# Altium PCB pqxPCB - 副本 (2).PcbDoc
Units mil, origin at the board's own origin, x right, y up, seen from the top; angles counter-clockwise.
Board outline 5905.51 x 3937.01 mil, 2 copper layers (Top Layer, Bottom Layer); 21 components, 37 nets, 167 pads, 0 vias.
Unrouted connection lines stored in the file: 4.
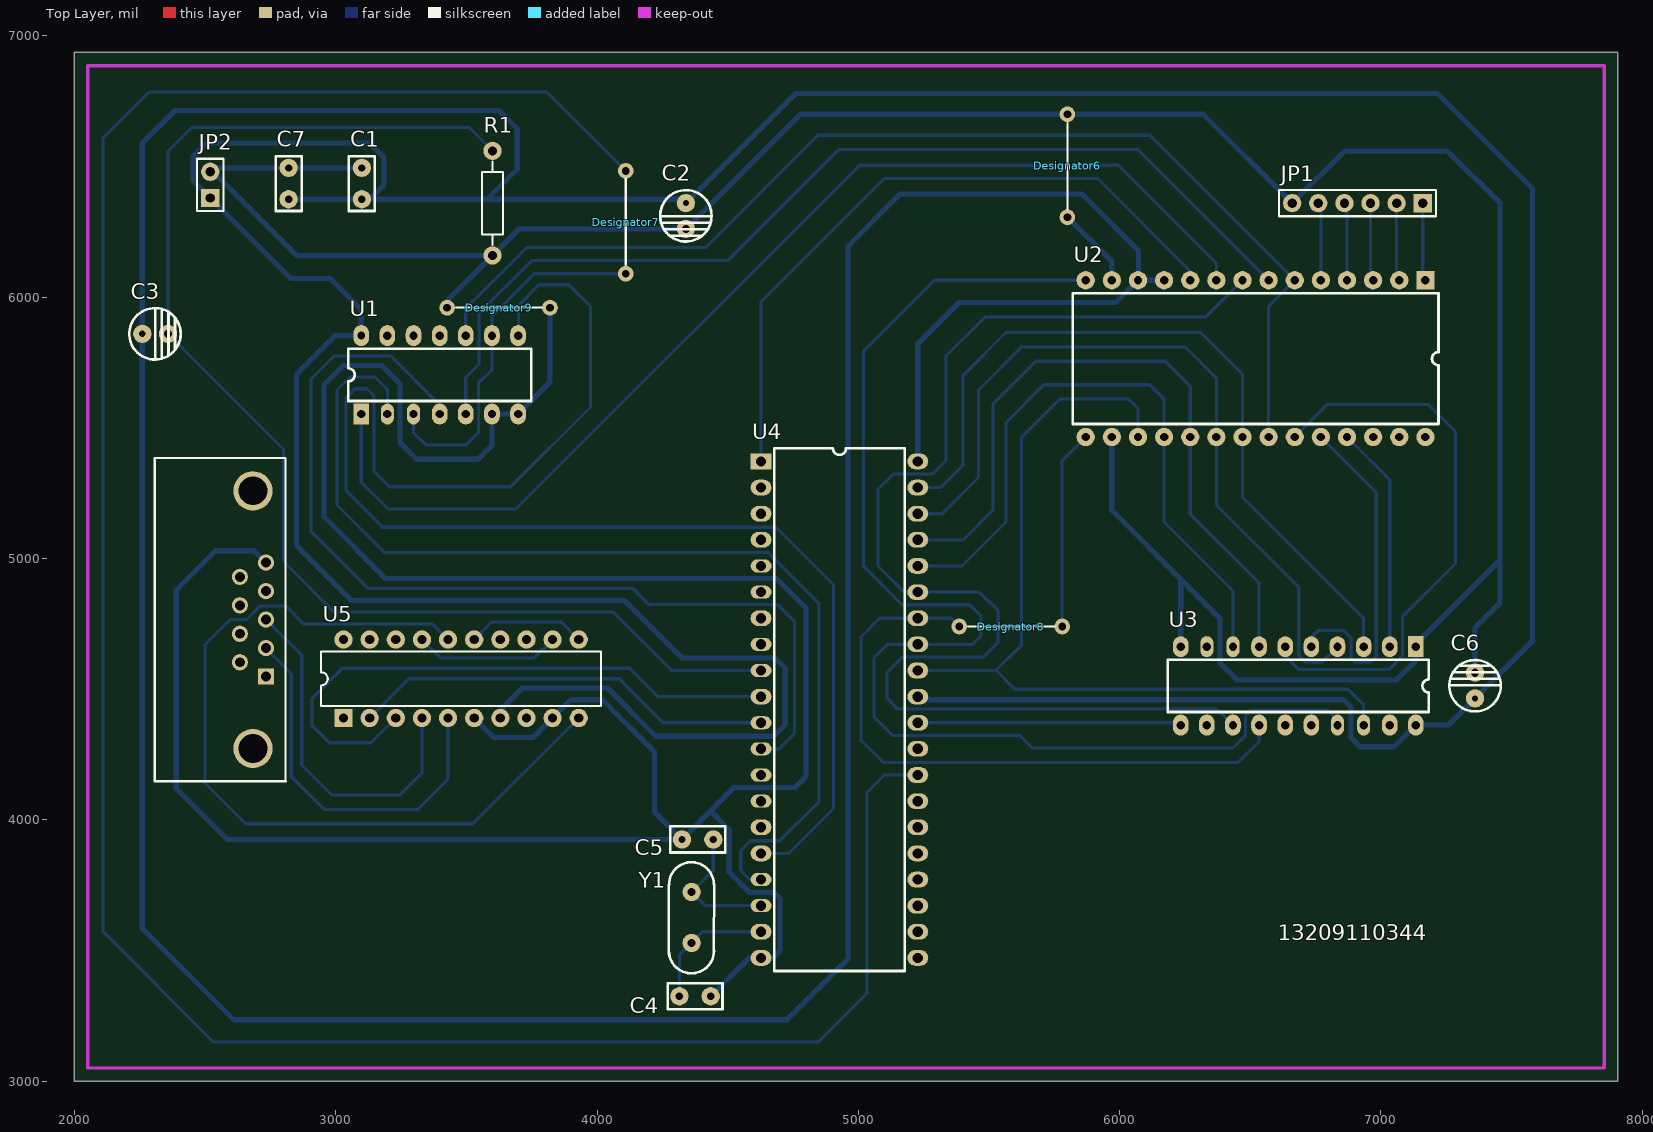
[diagram p0: Top Layer view]
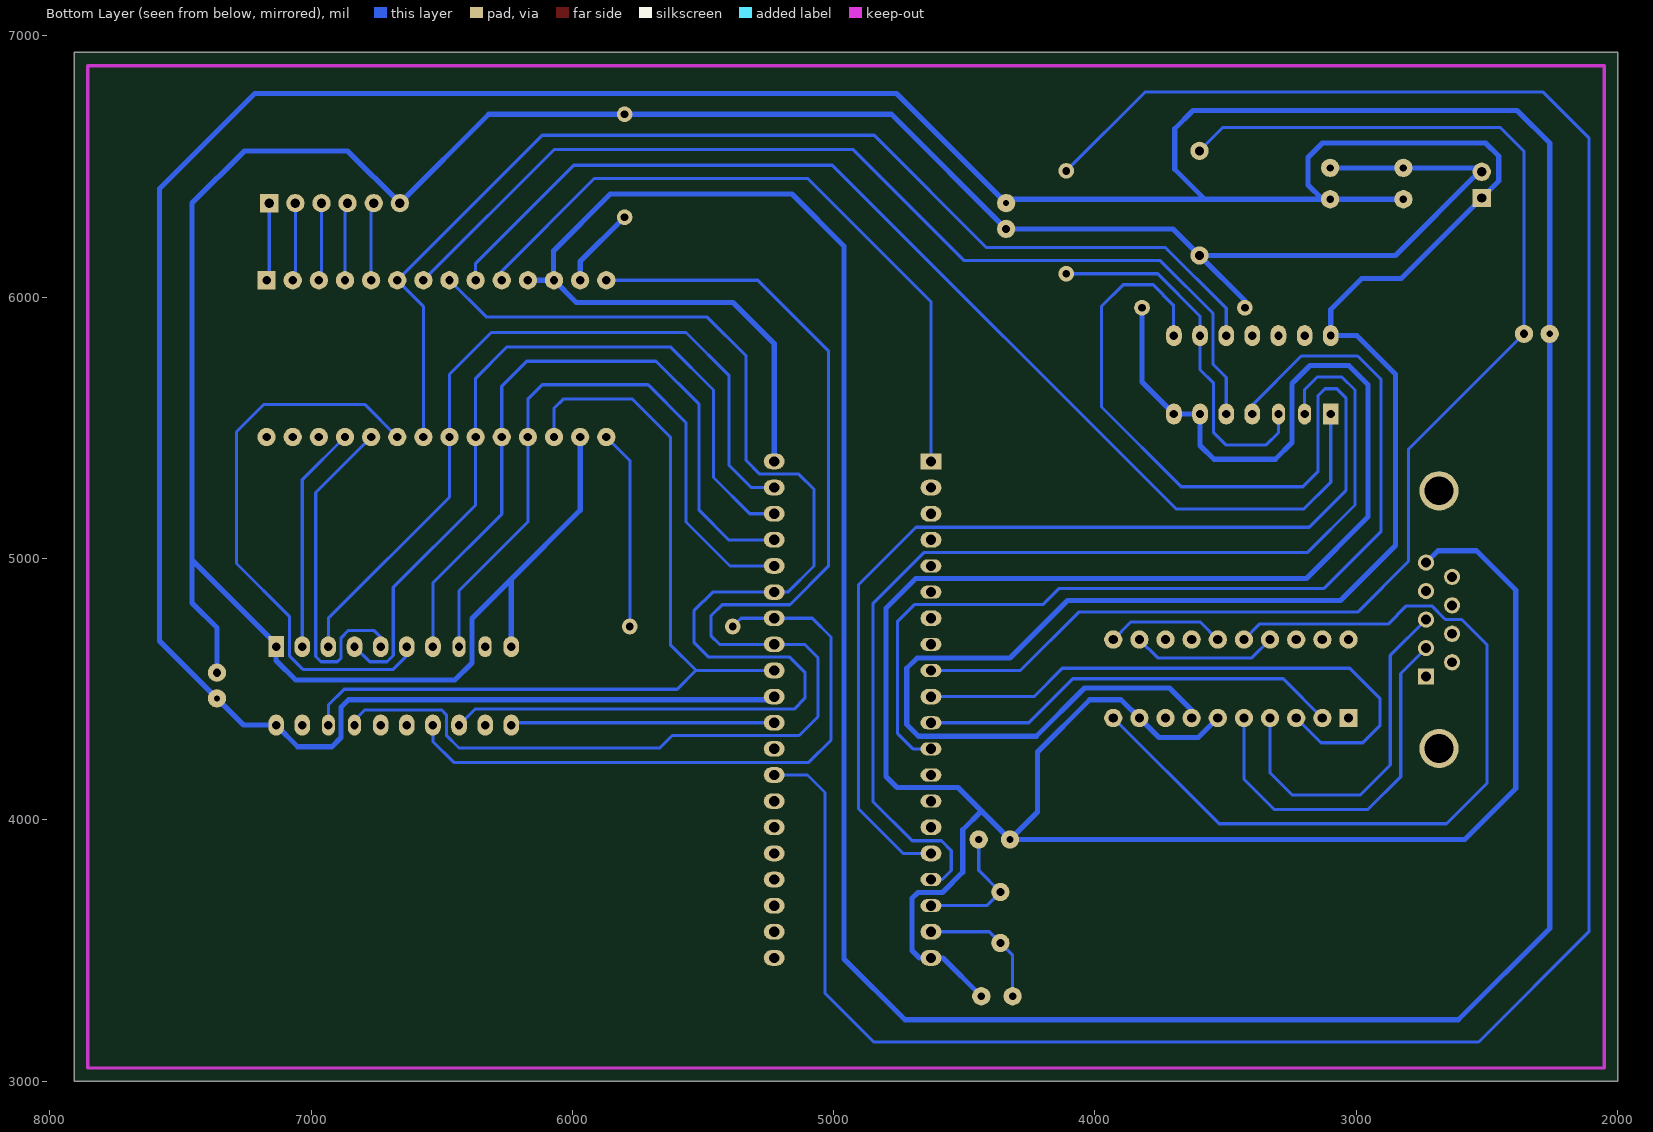
[diagram p1: Bottom Layer view, seen from below]

## Layer stack, top to bottom
Top Layer: signal copper 1.4
Dielectric: dielectric 12.6, FR-4, Dk 4.8
Bottom Layer: signal copper 1.4

## Board outline
2000,3000 7905.51,3000 7905.51,6937.01 2000,6937.01

## Design rules (kind name [scope] priority, off if disabled: settings)
Clearance [All] p1: gap=11.81
HoleSize [All] p1: absolutevalues=TRUE maxlimit=120 minlimit=1 maxpercent=80.000 minpercent=20.000
PolygonConnect [All] p1: connectstyle=Relief reliefconductorwidth=10 reliefentries=4 polygonreliefangle="90 Angle"
RoomDefinition pqxSheet01 [InComponentClass('pqxSheet01')] p1: confinementstyle=ConfineIn formatcopy=TRUE lockcomponents=FALSE outline 2051.18,6885.83 7854.33,6885.83 7854.33,3051.18 2051.18,3051.18
RoutingLayers [All] p1: top layer_v5=FALSE bottom layer_v5=TRUE
RoutingVias [All] p1: holewidth=23.62 width=70 viastyle="Through Hole" minholewidth=28 minwidth=60 maxholewidth=28 maxwidth=90
SilkscreenOverComponentPads [All] p1: minsilkscreentomaskgap=0
SolderMaskExpansion [All] p1: expansion=4
TestPointUsage [All] p1: valid=0 allowmultiple=FALSE
Testpoint [All] p1: side=15 testpointundercomponent=TRUE minsize=40 maxsize=100 preferedsize=60 minholesize=0 maxholesize=40 preferedholesize=32 testpointgrid=1 style=1023 order=0-112345678
Width Width_VCC_GND [(InNet('VCC') AND InNet('GND'))] p1: maxlimit=40 minlimit=20 preferedwidth=20
Width [All] p2: maxlimit=40 minlimit=12 preferedwidth=12
21 further rules are at their usual default settings.

## Classes and differential pairs
component class pqxSheet01: C1 C2 C3 C4 C5 C6 C7 JP1 JP2 R1 U1 U2 U3 U4 U5 Y1

## Components (designator, comment, footprint, x,y, rotation, side; value= is the part's Value field where it differs from the comment)
C1 "Cap" CB1 3100,6440 r270 top
C2 "Cap Pol1" CD2.5-5.0 4340,6360 r90 top
C3 "Cap Pol1" CD2.5-5.0 2260,5860 r180 top
C4 "Cap" CB1 4380,3325 r180 top
C5 "Cap" CB1 4380,3925 r0 top
C6 "Cap Pol1" CD2.5-5.0 7360,4465 r270 top
C7 "Cap" CB1 2820,6440 r270 top
Designator6 "Comment" JUMP10 5800,6306.3 r90 top
Designator7 "Comment" JUMP10 4110,6483.7 r270 top
Designator8 "Comment" JUMP10 5780,4740 r180 top
Designator9 "Comment" JUMP10 3820,5960 r180 top
JP1 "MHDR1X6" HDR1X6 7160,6360 r180 top
JP2 "MHDR1X2" HDR1X2 2520,6380 r90 top
R1 "Res2" AXIAL-0.4 3600,6360 r90 top
U1 "74LS02" DIP14 3400,5700 r90 top
U2 "ADC0809CCN" DIP28-WIDE 7170,6065 r270 top
U3 "74LS374" DIP20 6720,4505 r270 top
U4 "DS5000T-32-16" UDIP40 4860,4765 r0 top
U5 "MAX233AEPP" PP20 3480,4540 r0 top
Y1 "XTAL" JZ 4360,3625 r270 top
? "DB9" DB9U 2600,4760 r90 top

## Footprints (in the part's own frame and the unit in brackets; to place one, negate y for a bottom-side part, rotate by r counter-clockwise, add the part's x,y. Pads: shape width x height; smd on the part's side, far side on the other; paste and mask are expansions set on the pad)
AXIAL-0.4 [mil] "Resistor; 2 Leads"
  round 70 hole 33.46: 1(-200,0) 2(200,0)
  silkscreen extent -160,-40 160,40
CB1 [mil] "3mm,5.3mm"
  round 70 hole 27.56: 1(-55,0) 2(65,0)
  silkscreen extent -100,-50 110,50
CD2.5-5.0 [mil]
  round 70 hole 23.62: 1(0,0)
  round 70 hole 31.5: 2(-98.43,0)
  silkscreen extent -147,-98 50,98
DB9U [mil]
  rect 62x62 hole 38: 1(-211.81,-133.23)
  round 62 hole 38: 2(-102.81,-133.23) 3(6.19,-133.23) 4(115.19,-133.23) 5(224.19,-133.23) 6(-156.81,-33.23) 7(-47.81,-33.23) 8(61.19,-33.23) 9(170.19,-33.23)
  round 150 hole 110: ""(-486.81,-83.23) ""(499.19,-83.23)
  silkscreen extent -612,-208 624,292
DIP14 [mil]
  rect 80x60 hole 32: 1(-146.93,302.13)
  oval 80x50 hole 32: 2(-146.93,202.13) 3(-146.93,102.13)
  oval 80x60 hole 32: 4(-146.93,2.13) 5(-146.93,-97.87) 6(-146.93,-197.87) 7(-146.93,-297.87) 8(153.07,-297.87) 9(153.07,-197.87) 10(153.07,-97.87) 11(153.07,2.13) 12(153.07,102.13) 13(153.07,202.13)
  oval 80x60 hole 30: 14(153.07,302.13)
  silkscreen extent -97,-348 103,352
DIP20 [mil]
  rect 80x60 hole 32: 1(-157.72,413.47)
  oval 80x60 hole 32: 2(-157.72,313.47) 3(-157.72,213.47) 4(-157.72,113.47) 5(-157.72,13.47) 6(-157.72,-86.53) 7(-157.72,-186.53) 10(-157.72,-486.53) 11(142.28,-486.53) 12(142.28,-386.53) 13(142.28,-286.53) 14(142.28,-186.53) 15(142.28,-86.53) 16(142.28,13.47) 19(142.28,313.47) 20(142.28,413.47)
  oval 80x50 hole 32: 8(-157.72,-286.53) 9(-157.72,-386.53) 17(142.28,113.47) 18(142.28,213.47)
  silkscreen extent -108,-537 92,463
DIP28-WIDE [mil]
  rect 70x70 hole 32: 1(0,0)
  round 70 hole 32: 2(0,-100) 3(0,-200) 4(0,-300) 5(0,-400) 6(0,-500) 7(0,-600) 8(0,-700) 9(0,-800) 10(0,-900) 11(0,-1000) 12(0,-1100) 13(0,-1200) 14(0,-1300) 15(600,-1300) 16(600,-1200) 17(600,-1100) 18(600,-1000) 19(600,-900) 20(600,-800) 21(600,-700) 22(600,-600) 23(600,-500) 24(600,-400) 25(600,-300) 26(600,-200) 27(600,-100) 28(600,0)
  silkscreen extent 50,-1350 550,50
HDR1X2 [mil] "Connector; Header; 2 Position"
  rect 70x70 hole 35.43: 1(0,0)
  round 70 hole 35.43: 2(100,0)
  silkscreen extent -50,-50 150,50
HDR1X6 [mil] "Connector; Header; 6 Position"
  rect 70x70 hole 35.43: 1(0,0)
  round 70 hole 35.43: 2(100,0) 3(200,0) 4(300,0) 5(400,0) 6(500,0)
  silkscreen extent -50,-50 550,50
JUMP10 [mil] "10mm跳线"
  round 60 hole 30: 0(0,0) 0(393.7,0)
  silkscreen extent 30,0 360,0
JZ [mil]
  round 70 hole 30: 1(-99.09,2.17) 2(95.91,2.17)
  silkscreen extent -213,-86 212,88
PP20 [mil] "DIP; 20 Leads; Row Spacing 7.62 mm; Pitch 2.54 mm"
  rect 70x70 hole 35.43: 1(-450,-150)
  round 70 hole 35.43: 2(-350,-150) 3(-250,-150) 4(-150,-150) 5(-50,-150) 6(50,-150) 7(150,-150) 8(250,-150) 9(350,-150) 10(450,-150) 11(450,150) 12(350,150) 13(250,150) 14(150,150) 15(50,150) 16(-50,150) 17(-150,150) 18(-250,150) 19(-350,150) 20(-450,150)
  silkscreen extent -535,-104 535,104
UDIP40 [mil]
  rect 80x60 hole 39.37: 1(-232.36,606.69)
  oval 80x60 hole 39.37: 2(-232.36,506.69) 3(-232.36,406.69) 4(-232.36,306.69) 7(-232.36,6.69) 10(-232.36,-293.31) 15(-232.36,-793.31) 16(-232.36,-893.31) 19(-232.36,-1193.31) 20(-232.36,-1293.31) 21(367.64,-1293.31) 22(367.64,-1193.31) 23(367.64,-1093.31) 24(367.64,-993.31) 25(367.64,-893.31) 26(367.64,-793.31) 27(367.64,-693.31) 28(367.64,-593.31) 29(367.64,-493.31) 30(367.64,-393.31) 31(367.64,-293.31) 32(367.64,-193.31) 33(367.64,-93.31) 34(367.64,6.69) 35(367.64,106.69) 36(367.64,206.69) 37(367.64,306.69) 38(367.64,406.69) 39(367.64,506.69) 40(367.64,606.69)
  oval 80x50 hole 39.37: 5(-232.36,206.69) 6(-232.36,106.69) 8(-232.36,-93.31) 9(-232.36,-193.31) 11(-232.36,-393.31) 12(-232.36,-493.31) 13(-232.36,-593.31) 14(-232.36,-693.31) 17(-232.36,-993.31) 18(-232.36,-1093.31)
  silkscreen extent -182,-1343 318,657

## Part data
C1 C4 C5 C7: "Capacitor"
C2 C3 C6: "Polarized Capacitor (Radial)"
JP1: library part "Header 6", "Header, 6-Pin"
JP2: library part "Header 2", "Header, 2-Pin"
R1: "Resistor"
U2: "8-bit Microprocessor Compatible A/D Converters With 8-Channel Multiplexer"
U4: "Soft Microcontroller"
U5: "+5V-Powered, Multichannel RS-232 Driver/Receiver"
Y1: "Crystal Oscillator"

## Nets (pads, with @x,y where several pads share a name; then routed paths per layer and width w, separated by ;. In a path a pad name is that pad's centre, name@x,y a point inside that pad or via, vN(x,y) a via of type N, cw(c..) or ccw(c..) an arc to the next point about the centre after c; other vN are vias at no path point)
A: U2.25 U3.2 | length 870
  Bottom Layer w12: U2.25 7033.47,5301.53 U3.2
AD_CLK: U2.10 U4.1 | length 2631
  Bottom Layer w12: U4.1 4627.64,5982.64 5100,6455 5915,6455 6270,6100 U2.10
ALE: U3.11 U4.30 | length 1009.5
  Bottom Layer w12: U4.30 6224.49,4371.69 U3.11
B: U2.24 U3.5 | length 1326.8
  Bottom Layer w12: U3.5 6733.47,4699 6759.47,4725 6856.33,4725 6884.56,4696.77 6884.56,4619.44 6899.1,4604.9 6961.9,4604.9 6982,4625 6982,5253 U2.24
C: U2.23 U3.6 | length 2178.3
  Bottom Layer w12: U3.6 6633.47,4628.72 6687.18,4575 7029.29,4575 7082.85,4628.57 7082.85,4778.85 7285,4981 7285,5485 7180,5590 6795,5590 U2.23
EOC: U1.5 U2.7 | length 3894.5
  Bottom Layer w12: U1.5 3497.87,5692.87 3548.13,5743.13 3548.13,5938.13 3750,6140 4500,6140 4925,6565 6070,6565 U2.7
GND: ?.5 C1.1 C2.2 C4.1 C5.1 C6.2 C7.1 Designator6.0 Designator9.0 JP1.6 JP2.2 R1.1 U1.6 U1.7 U2.13 U2.16 U3.1 U3.10 U4.20 U5.6 U5.9 | length 22078.2
  Bottom Layer w20: ?.5 2687.42,5030 2540,5030 2390,4880 2390,4120 2585,3925 C5.1 ; C1.1 C7.1 2535,6495 JP2.2 2530,6480 2850,6160 R1.1 ; Designator9.0@3426.3,5960 3426.3,5986.3 R1.1 ; U5.6 3605,4315 3755,4315 U5.9 3900,4460 4020,4460 4220,4260 4220,4030 C5.1 ; Designator9.0@3820,5960 3820,5675.2 U1.7 U1.6 3597.87,5432.87 3545,5380 3310,5380 3246,5444 3246,5670 3177.19,5738.81 3028.81,5738.81 2955,5665 2955,5160 3191.12,4923.88 4686.12,4923.88 4800,4810 4800,4166 4757.88,4123.88 4523.88,4123.88 4434,4034 ; C4.1 4581.69,3471.69 U4.20 4671.38,3471.69 4699.69,3500 4699.69,3700 4677.69,3722 4584,3722 4506,3800 4506,3962 4434,4034 ; Designator6.0@5800,6306.3 5970,6136.3 U2.13 ; 5970,5195 5970,5185 ; U2.16 5970,5185 ; U3.10 6233.47,4914.35 6237.06,4917.94 ; C6.2 7360,4735 7455,4830 7455,4995 ; R1.1 3701.57,6261.57 C2.2 4778.43,6700 5800,6700 6320,6700 JP1.6 6860,6560 7255,6560 7455,6360 7455,4995 ; C5.1 4434,4034 ; 5970,5185 6237.06,4917.94 ; 6237.06,4917.94 6384,4771 6384,4601 6450,4535 7058.15,4535 7133.47,4610.31 U3.1 7133.47,4673.47 7455,4995
INT0: U1.4 U4.12 | length 3796.4
  Bottom Layer w12: U1.4 3397.87,5587.13 3210,5775 2995,5775 2905,5685 2905,5105 3125,4885 4138.88,4885 4200,4823.88 4691.12,4823.88 4755,4760 4755,4330 4696.69,4271.69 U4.12
Net_2: ?.2 U5.5 | length 1466.7
  Bottom Layer w12: ?.2 2830,4560.42 2830,4165 2955,4040 3315,4040 3430,4155 U5.5
Net_3: ?.3 U5.4 | length 1365.7
  Bottom Layer w12: ?.3 2870,4629.42 2870,4210 2985,4095 3245,4095 3330,4180 U5.4
NetC3_2: C3.2 R1.2 U4.9 | length 5069
  Bottom Layer w12: R1.2 3510,6650 2450,6650 2358.43,6558.43 C3.2 2800,5418.43 2800,4990 2995,4795 4062,4795 4285.31,4571.69 U4.9
NetC4_2: C4.2 U4.19 Y1.2 | length 506.7
  Bottom Layer w12: C4.2 4315,3481.93 Y1.2 4404.76,3571.69 U4.19
NetC5_2: C5.2 U4.18 Y1.1 | length 522.4
  Bottom Layer w12: C5.2 4445,3806.93 Y1.1 4414.57,3671.69 U4.18
NetJP1_1: JP1.1 U2.1 | length 299.1
  Bottom Layer w12: JP1.1 7160,6075 U2.1
NetJP1_2: JP1.2 U2.2 | length 299.1
  Bottom Layer w12: JP1.2 7060,6075 U2.2
NetJP1_3: JP1.3 U2.3 | length 299.1
  Bottom Layer w12: JP1.3 6960,6075 U2.3
NetJP1_4: JP1.4 U2.4 | length 299.1
  Bottom Layer w12: JP1.4 6870,6350 U2.4
NetJP1_5: JP1.5 U2.5 | length 299.1
  Bottom Layer w12: JP1.5 6770,6350 U2.5
NetU5_10: U5.10 U5.16 | length 3237.1
  Bottom Layer w12: U5.16 3371,4749 2878.28,4749 2808.28,4819 2711.35,4819 2659.35,4767 2597,4767 2500,4670 2500,4140 2655,3985 3525,3985 U5.10
NetU5_11: U5.11 U5.15 | length 456.2
  Bottom Layer w12: U5.15 3597.9,4757.9 3862.1,4757.9 U5.11
NetU5_12: U5.12 U5.17 | length 558
  Bottom Layer w12: U5.17 3400,4620 3760,4620 U5.12
OE: U1.1 U2.9 | length 4340.4
  Bottom Layer w12: U1.1 3097.87,5292.13 3200,5190 3690,5190 5005,6505 5995,6505 6370,6130 U2.9
P00: U2.21 U3.3 U4.39 | length 2990.2
  Bottom Layer w12: U4.39 5315.69,5271.69 5400,5356 5400,5700 5565,5865 6310,5865 6470,5705 6470,5235 6933.47,4771.53 U3.3
P01: U2.20 U3.4 U4.38 | length 3026.4
  Bottom Layer w12: U4.38 5321.69,5171.69 5460,5310 5460,5645 5625,5810 6250,5810 6370,5690 6370,5205 6685.46,4889.54 6685.46,4628.83 6709.38,4604.9 6775.65,4604.9 U3.4
P02: U2.19 U3.7 U4.37 | length 2708.7
  Bottom Layer w12: U4.37 5402.26,5071.69 5515,5184.43 5515,5590 5680,5755 6175,5755 6270,5660 6270,5170 6533.47,4906.53 U3.7
P03: U2.18 U3.8 U4.36 | length 2531.4
  Bottom Layer w12: U4.36 5396.72,4971.69 5565,5139.97 5565,5520 5710,5665 6115,5665 6170,5610 6170,5140 6433.47,4876.53 U3.8
P04: U2.8 U3.13 U4.35 | length 4843.6
  Bottom Layer w12: U3.13 6372.3,4423.88 5151.12,4423.88 5110,4465 5110,4565 5168,4623 5478,4623 5535,4680 5535,4800 5463.31,4871.69 U4.35 5175,4871.69 5075,4971.69 5075,5265 5133,5323 5283,5323 5335,5375 5335,5775 5485,5925 6330,5925 U2.8
P05: Designator8.0 U2.15 U3.14 U4.34 | length 3220.9
  Bottom Layer w12: Designator8.0@5386.3,4740 5354.61,4771.69 U4.34 5081.69,4771.69 5010,4700 5010,4305 5095,4220 6453.47,4220 6533.47,4300 U3.14 ; Designator8.0@5780,4750 5780,5375 U2.15
P06: U2.14 U3.17 U4.33 | length 5025.7
  Bottom Layer w12: U2.14 5290,6065 5020,5795 5020,4970 5167,4823 5427,4823 5470,4780 5470,4705 5436.69,4671.69 U4.33 5111.69,4671.69 5060,4620 5060,4395 5132,4323 5617,4323 5665,4275 6433.5,4275 6482,4323.5 6482,4403 6499.53,4420.53 6794.47,4420.53 6833.47,4381.53 U3.17
P07: U2.17 U3.18 U4.32 | length 3700.6
  Bottom Layer w12: U2.17 6070,5575 6035,5610 5770,5610 5625,5465 5625,4670 5527,4572 5599,4500 6873,4500 6933.47,4439.53 U3.18 ; U4.32 5527.31,4571.69 U4.32
P27: Designator7.0 U1.3 U1.9 U4.28 | length 10806.5
  Bottom Layer w12: U1.3 3297.87,5482.13 3345,5435 3500,5435 3546,5481 3546,5671 3597.87,5722.87 U1.9 3597.87,5927.87 3760,6090 Designator7.0@4110,6090 ; Designator7.0@4110,6483.7 3808.7,6785 2285,6785 2110,6610 2110,3572 2532,3150 4847,3150 5033,3336 5033,4104.69 5100,4171.69 U4.28
RD: U1.2 U4.17 | length 4071.4
  Bottom Layer w12: U1.2 3197.87,5647.13 3150,5695 3055,5695 3005,5645 3005,5205 3186.12,5023.88 4653.06,5023.88 4850,4826.94 4850,4070.48 4699.52,3920 4587.5,3920 4550,3882.5 4550,3806.5 4584.81,3771.69 U4.17
RX: U4.10 U5.3 | length 2301.4
  Bottom Layer w12: U5.3 3135,4295 2975,4295 2910,4360 2910,4465 3025,4580 4125,4580 4233.31,4471.69 U4.10
START: U1.10 U2.6 U2.22 | length 4422.5
  Bottom Layer w12: U1.10 3497.87,5957.87 3730,6190 4415,6190 4845,6620 6115,6620 U2.6 6570,5965 U2.22
TX: U4.11 U5.2 | length 1629.5
  Bottom Layer w12: U5.2 3280,4540 4085,4540 4253.31,4371.69 U4.11
VCC: C1.2 C2.1 C3.1 C6.1 C7.2 JP2.1 U1.14 U2.11 U2.12 U3.20 U4.31 U4.40 U5.7 | length 29350.6
  Bottom Layer w20: C7.2 C1.2 ; U5.7 3630,4420 3715,4505 4040,4505 4225,4320 4675,4320 4720,4365 4720,4580 4680,4620 4325,4620 4105,4840 3060,4840 2850,5050 2850,5705 2998.07,5853.07 U1.14 3097.87,5953 2978.87,6072 2828,6072 JP2.1 2455,6445 2455,6540 2505,6590 3130,6590 3185,6535 3185,6430 3130,6375 3580,6375 ; U4.31 5239.33,4460 6856,4460 6885,4431 6885,4315 6920,4280 7050.75,4280 U3.20 7257.72,4362.72 C6.1 7580,4685 7580,6415 7215,6780 4760,6780 C2.1 4325,6375 3580,6375 ; U4.40 5227.64,5822.64 5385,5980 5985,5980 6072.5,6067.5 6072.5,6177.5 5855,6395 5160,6395 4960,6195 4960,3468 4727,3235 2610,3235 2260,3585 C3.1 2260,6590 2385,6715 3625,6715 3695,6645 3695,6490 3580,6375 ; U2.12 U2.11
WR: U1.8 U4.16 | length 5820.2
  Bottom Layer w12: U1.8 3700,5855.2 3700,5970 3777.6,6047.6 3892.4,6047.6 3975,5965 3975,5580 3670,5275 3205,5275 3146,5334 3146,5624 3120,5650 3075,5650 3040,5615 3040,5260 3180,5120 4685,5120 4905,4900 4905,4042 4734.69,3871.69 U4.16
pads on no net: ?. ?.1 ?.4 ?.6 ?.7 ?.8 ?.9 U1.11 U1.12 U1.13 U2.26 U2.27 U2.28 U3.9 U3.12 U3.15 U3.16 U3.19 U4.2 U4.3 U4.4 U4.5 U4.6 U4.7 U4.8 U4.13 U4.14 U4.15 U4.21 U4.22 U4.23 U4.24 U4.25 U4.26 U4.27 U4.29 U5.1 U5.8 U5.13 U5.14 U5.18 U5.19 U5.20

## Keep-outs
Keep-Out Layer:
  lines w11.81: 2051.18,3051.18 7854.33,3051.18 7854.33,6885.83 2051.18,6885.83 2051.18,3051.18

## Silkscreen, mask and mechanical layers (free items; w line width, h text height)
Top Overlay:
  text "13209110344" at 6605,3540 h60
Drill Drawing:
  text "PanQuanXing" at 6900,3310 h60
  text "2015.11.25" at 6900,3200 h60

## Dimensions
2051.18,3051.18 to 7854.33,3051.18 on Mechanical 1
2051.18,3051.18 to 2051.18,6885.83 on Mechanical 1